# Altium PCB PCB_esp32module_2022-06-23.pcbdoc
Units mm, origin at the board's own origin, x right, y up, seen from the top; angles counter-clockwise.
Board outline 65.1 x 68.98 mm, 2 copper layers (Top Layer, Bottom Layer); 17 components, 31 nets, 101 pads, 69 vias.
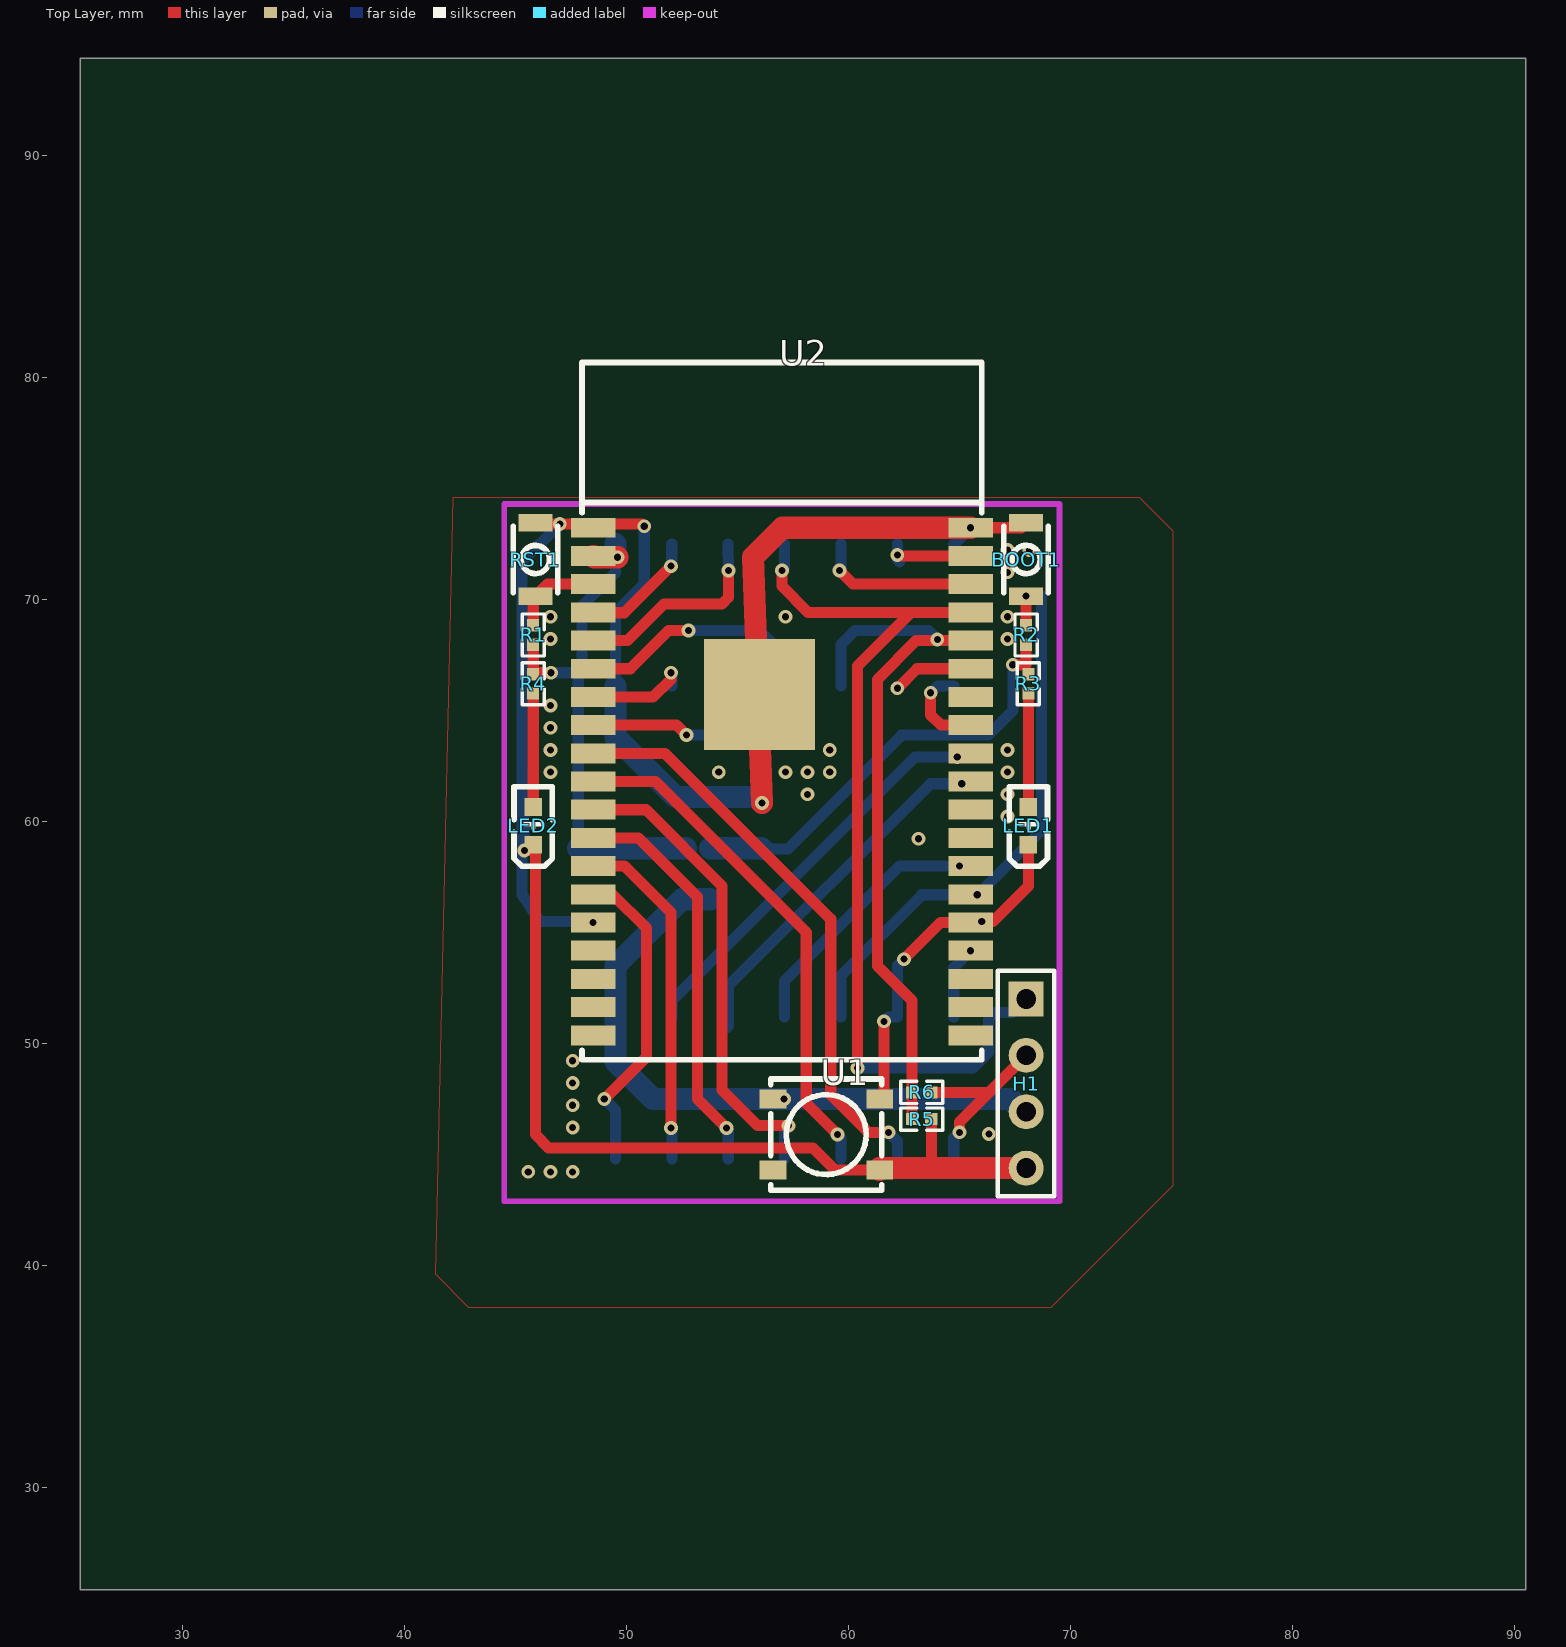
[diagram p0: Top Layer view]
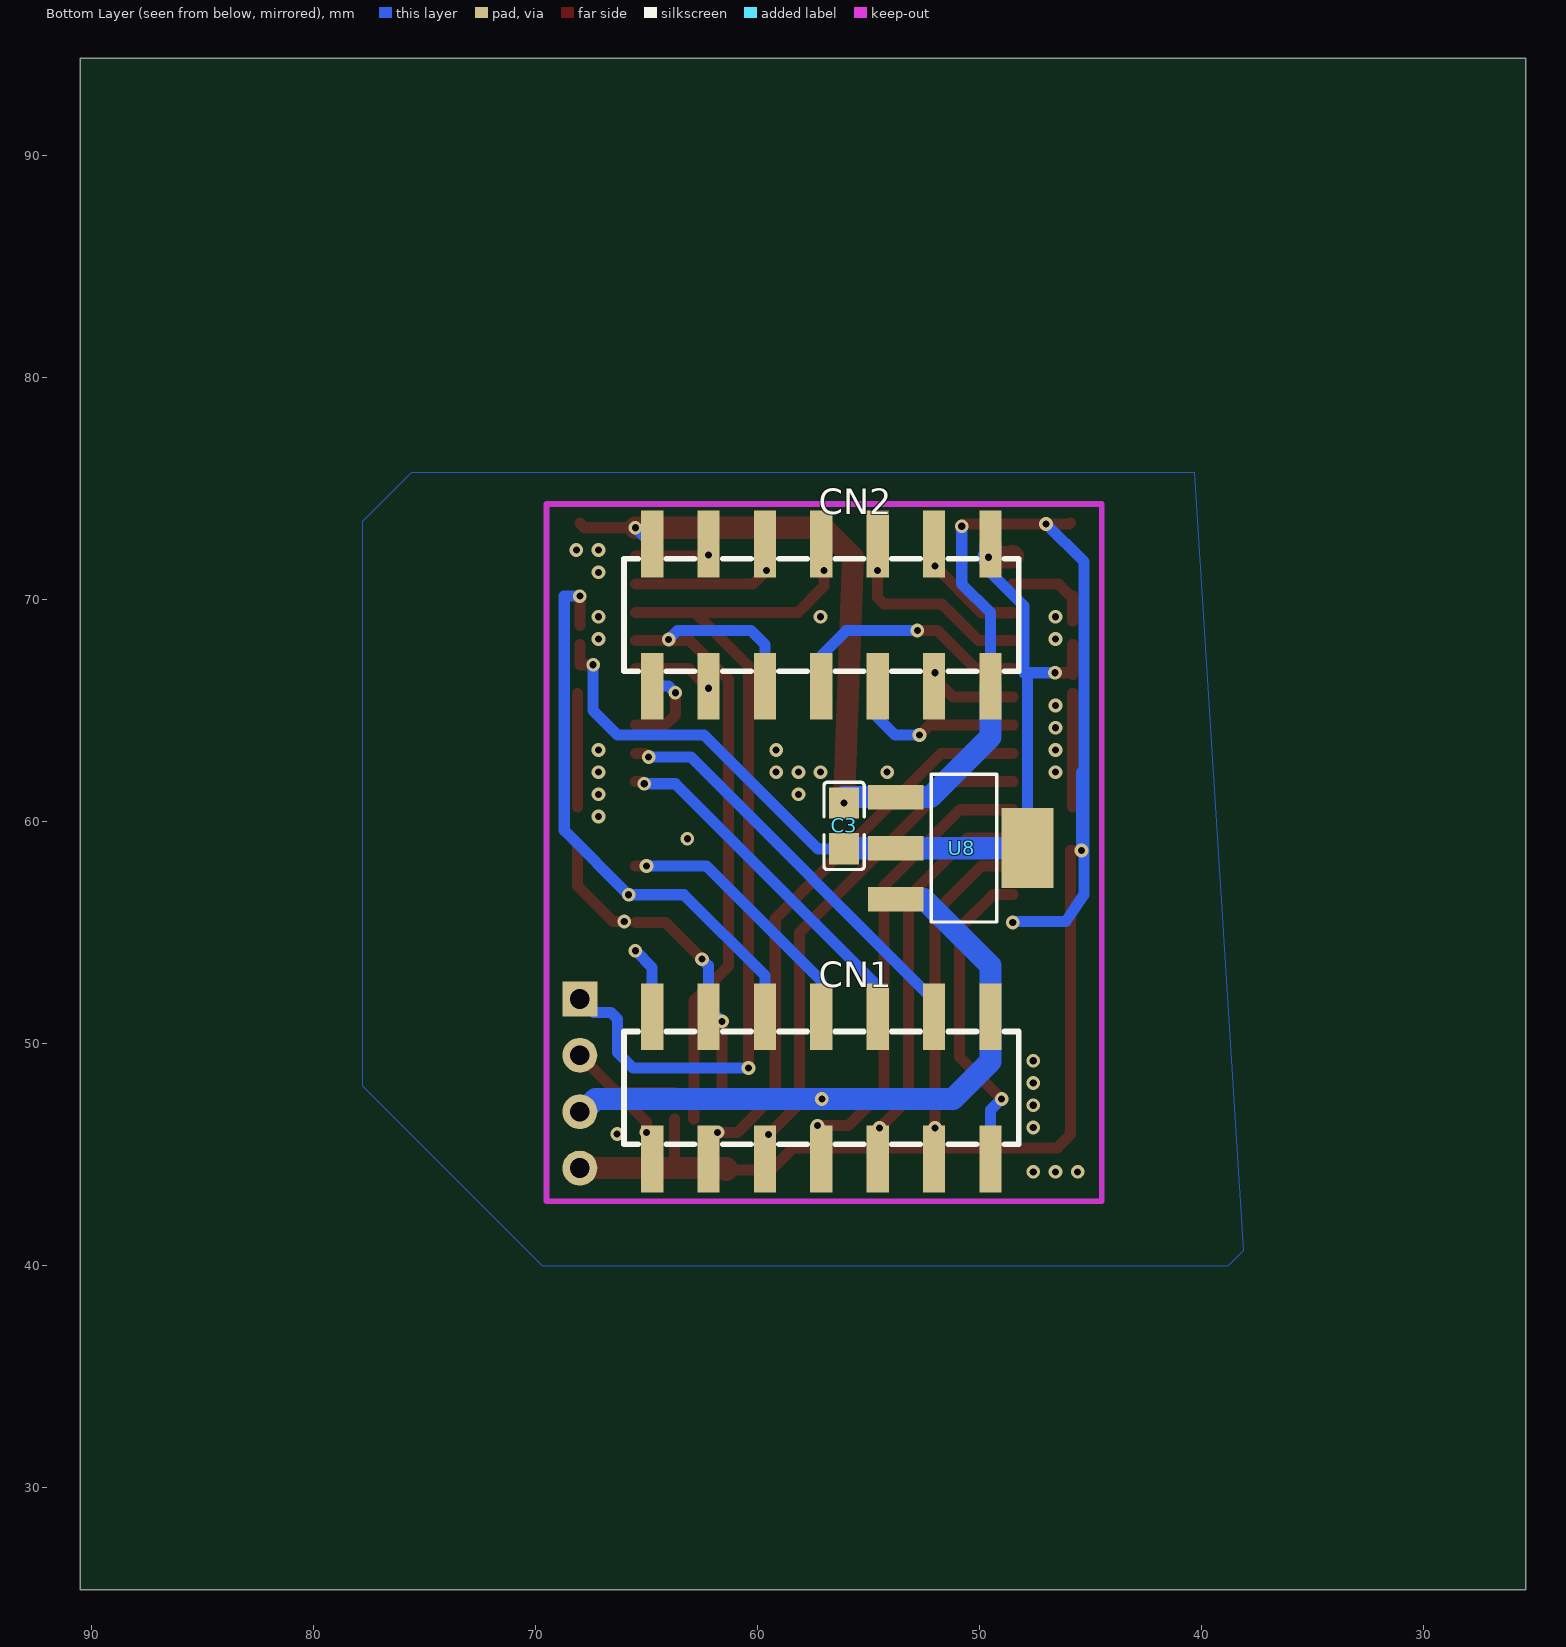
[diagram p1: Bottom Layer view, seen from below]

## Layer stack, top to bottom
Top Layer: signal copper (thickness not stored)
Dielectric: dielectric 0.32, FR-4, Dk 4.8
Bottom Layer: signal copper (thickness not stored)

## Board outline
90.5,25.4 25.4,25.4 25.4,94.375 90.5,94.375

## Components (designator, comment, footprint, x,y, rotation, side; value= is the part's Value field where it differs from the comment)
BOOT1 "K2-1827SQ-C3DW-06" SW-SMD_L3.0-W2.0-LS3.5 68,71.8 r270 top
C3 "10uF" C0805 56.1,59.8 r90 bottom
CN1 "2.54-2*7P针立贴" HDR-SMD_14P-P2.54-V-M-R2-C7-S2.54-LS8.0 57.122,48 r0 bottom
CN2 "2.54-2*7P针立贴" HDR-SMD_14P-P2.54-V-M-R2-C7-S2.54-LS8.0 57.122,69.3 r0 bottom
H1 "HDR-F-2.54_1x4" HDR-F-2.54_1X4 68,48.2 r270 top
LED1 "KT-0603R" LED0603-R-RD 68.1,59.8 r90 top
LED2 "KT-0603R" LED0603-R-RD 45.8,59.8 r90 top
R1 "10kΩ" R0402 45.8,68.4 r270 top
R2 "10kΩ" R0402 68,68.4 r90 top
R3 "10kΩ" R0402 68.1,66.2 r90 top
R4 "10kΩ" R0402 45.8,66.2 r90 top
R5 "10kΩ" R0402 63.3,46.6 r0 top
R6 "10kΩ" R0402 63.3,47.8 r180 top
RST1 "K2-1827SQ-C3DW-06" SW-SMD_L3.0-W2.0-LS3.5 45.9,71.8 r90 top
U1 "5050WS2812B" LED-SMD_5050WS2812B 59,45.9 r0 top
U2 "ESP32-WROVER-IB" WIRELM-SMD_ESP32-WROVER-IB 57,61.8 r0 top
U8 "AZ1117H-3.3TRE1" SOT-223-3_L6.5-W3.4-P2.30-LS7.0-BR 50.8,58.8 r180 bottom

## Footprints (in the part's own frame and the unit in brackets; to place one, negate y for a bottom-side part, rotate by r counter-clockwise, add the part's x,y. Pads: shape width x height; smd on the part's side, far side on the other; paste and mask are expansions set on the pad)
C0805 [mm]
  rect 1.41x1.35 smd: 1(1.03,0) 2(-1.03,0)
  silkscreen extent -1.96,-0.9 1.96,0.9
HDR-F-2.54_1X4 [mil]
  rect 62x62 hole 35: 1(-150,0)
  round 62 hole 35: 2(-50,0) 3(50,0) 4(150,0)
  silkscreen extent -200,-50 200,50
HDR-SMD_14P-P2.54-V-M-R2-C7-S2.54-LS8.0 [mm]
  rect 1x3 smd: 1(7.62,-3.2) 2(7.62,3.2) 3(5.08,-3.2) 4(5.08,3.2) 5(2.54,-3.2) 6(2.54,3.2) 7(0,-3.2) 8(0,3.2) 9(-2.54,-3.2) 10(-2.54,3.2) 11(-5.08,-3.2) 12(-5.08,3.2) 13(-7.62,-3.2) 14(-7.62,3.2)
  silkscreen extent -8.89,-2.54 8.89,2.54
LED0603-R-RD [mm]
  rect 0.8x0.8 smd: 1(0.851,0) 2(-0.851,0)
  silkscreen extent -1.82,-0.86 1.77,0.86
LED-SMD_5050WS2812B [mm]
  rect 1.2x0.85 smd: 1(-2.4,1.6) 2(-2.4,-1.6) 3(2.4,-1.6) 4(2.4,1.6)
  silkscreen extent -2.5,-2.5 2.5,2.5
R0402 [mm]
  rect 0.566x0.54 smd: 1(-0.433,0) 2(0.433,0)
  silkscreen extent -0.94,-0.5 0.94,0.5
SOT-223-3_L6.5-W3.4-P2.30-LS7.0-BR [mm]
  rect 2.5x1.1 smd: 1(-2.97,2.3) 2(-2.97,0) 3(-2.97,-2.3)
  rect 2.34x3.6 smd: 4(2.97,0)
  silkscreen extent -1.37,-3.33 1.57,3.33
SW-SMD_L3.0-W2.0-LS3.5 [mm]
  rect 0.8x1.524 smd: 1(-1.651,0) 2(1.65,0)
  silkscreen extent -1.5,-1 1.5,1
WIRELM-SMD_ESP32-WROVER-IB [mm]
  rect 2x0.9 smd: 1(-8.5,11.43) 2(-8.5,10.16) 3(-8.5,8.89) 4(-8.5,7.62) 5(-8.5,6.35) 6(-8.5,5.08) 7(-8.5,3.81) 8(-8.5,2.54) 9(-8.5,1.27) 10(-8.5,0) 11(-8.5,-1.27) 12(-8.5,-2.54) 13(-8.5,-3.81) 14(-8.5,-5.08) 15(-8.5,-6.35) 16(-8.5,-7.62) 17(-8.5,-8.89) 18(-8.5,-10.16) 19(-8.5,-11.43) 20(8.5,-11.43) 21(8.5,-10.16) 22(8.5,-8.89) 23(8.5,-7.62) 24(8.5,-6.35) 25(8.5,-5.08) 26(8.5,-3.81) 27(8.5,-2.54) 28(8.5,-1.27) 29(8.5,0) 30(8.5,1.27) 31(8.5,2.54) 32(8.5,3.81) 33(8.5,5.08) 34(8.5,6.35) 35(8.5,7.62) 36(8.5,8.89) 37(8.5,10.16) 38(8.5,11.43)
  rect 5x5 smd: 39(-1,3.93)
  silkscreen extent -9,-12.53 9,18.87

## Via types
v1: diameter 0.62, hole 0.32, Top Layer to Bottom Layer, tented both sides, 69 vias

## Nets (pads, with @x,y where several pads share a name; then routed paths per layer and width w, separated by ;. In a path a pad name is that pad's centre, name@x,y a point inside that pad or via, vN(x,y) a via of type N, cw(c..) or ccw(c..) an arc to the next point about the centre after c; other vN are vias at no path point)
3V3: C3.2 CN2.13 R1.2 R2.1 R3.2 R4.2 U2.2 U8.2 U8.4 | length 45.5
  Top Layer w0.5: R1.2@45.8,67.967 45.8,66.633 45.867,66.7 v1(46.6,66.7) ; v1@67.4,67.06 68,67.06 R2.1
  Top Layer w1: U2.2 48.56,71.9 v1(49.6,71.9)
  Bottom Layer w0.5: U8.4 47.83,66.7 46.601,66.7 48,66.7 48,69.7 49.504,71.204 CN2.13@49.504,72.499 ; C3.2 57.271,58.77 62.399,63.901 66.301,63.901 67.401,65.001 v1@67.401,67.061
  Bottom Layer w1: U8.4 U8.2@52.67,58.8 ; CN2.13 49.501,71.999 v1(49.6,71.9) ; U8.2 56.07,58.8 C3.2
  other v1: 67.4,67.06
+5V: CN1.13 H1.3 U1.1 U8.3 | length 29.2
  Bottom Layer w1: U8.3@53.771,56.5 52.501,56.5 49.504,53.503 49.504,51.199 49.504,49.197 51.201,47.5 v1(57.1,47.5) 67.3,47.5 67.871,46.929 H1.3
GND: BOOT1.1 C3.1 CN2.1 CN2.14 H1.4 LED2.2 R5.2 RST1.2 U1.3 U2.1 U2.15 U2.38 U2.39 U8.1 | length 112.5
  Top Layer w0.5: v1(45.4,58.7) 45.9,58.7 45.9,45.9 46.499,45.301 47.901,45.301 ; RST1.2 45.95,73.4 v1(47,73.4) 50.7,73.4 v1(50.8,73.3) ; 47.9,45.3 58.4,45.3 59.4,44.3 U1.3 ; 63.733,44.39 R5.2 ; v1(65.5,73.23) 67.779,73.23 BOOT1.1
  Top Layer w1: v1(56.1,60.83) 55.699,71.9 57.03,73.231 U2.38@65.501,73.231 ; U1.3@61.401,44.3 61.401,44.389 H1.4
  Bottom Layer w0.5: 45.3,61.131 45.3,62.3 45.4,62.2 v1(45.4,58.7) ; v1(47,73.4) 45.3,71.7 45.3,56.7 46.1,55.5 48.45,55.5 v1(48.5,55.45) ; CN2.14 49.503,69.403 50.8,70.7 v1(50.8,73.3) ; CN2.1 64.77,72.5 v1(65.5,73.23)
  Bottom Layer w1: CN2.14@49.504,66.096 49.504,63.802 52.206,61.1 53.771,61.1 56.1,61.1 v1(56.1,60.83)
  other v1: 45.577,44.223 46.577,44.223 47.577,44.223 66.32,45.923 47.577,46.223 47.577,47.223 47.577,48.223 47.577,49.223 63.157,59.223 67.157,60.223 58.157,61.223 67.157,61.223 46.577,62.223 54.157,62.223 57.157,62.223 58.157,62.223 59.157,62.223 67.157,62.223 46.577,63.223 59.157,63.223 67.157,63.223 46.577,64.223 46.577,65.223 46.577,68.223 67.157,68.223 46.577,69.223 57.157,69.223 67.157,69.223 67.157,71.223 67.157,72.223 68.157,72.223
IO-0: BOOT1.2 CN1.5 R2.2 U2.25 | length 26.5
  Top Layer w0.5: U2.25@65.501,56.721 U2.25@65.8,56.7 ; R2.2 v1(68,70.15)
  Bottom Layer w0.5: CN1.5 59.663,53.063 63.3,56.7 v1(65.8,56.7) 68.701,59.601 68.701,70.15 v1(68,70.15)
IO-2: CN1.3 LED1.2 U1.4 U2.24 | length 15.3
  Top Layer w0.5: U1.4 61.6,47.7 v1(61.6,51) ; v1(62.5,53.8) 64.15,55.45 U2.24 ; v1(66,55.5) 66.5,55.5 68.1,57.1 LED1.2
  Bottom Layer w0.5: v1(61.6,51) 61.8,51.199 62.204,51.199 62.204,53.503 v1@62.501,53.8
IO-4: CN1.7 U2.26 | length 12.1
  Top Layer w0.5: v1(65,58) U2.26@65.501,57.991
  Bottom Layer w0.5: CN1.7@57.124,51.199 57.124,52.822 62.3,58.001 v1(65,58)
IO-5: CN1.9 U2.29 | length 16.7
  Top Layer w0.5: v1(65.1,61.7) 65.201,61.801 U2.29@65.501,61.801
  Bottom Layer w0.5: CN1.9@54.5,50.701 54.584,50.782 54.584,51.199 54.584,52.583 63.7,61.699 v1(65.1,61.7)
IO-12: CN1.14 U2.14 | length 14.4
  Top Layer w0.5: U2.14 49.38,56.72 50.9,55.2 50.9,49.4 v1(49,47.5)
  Bottom Layer w0.5: v1(49,47.5) 49.503,46.998 CN1.14
IO-13: U2.16
IO-14: CN1.12 U2.13 | length 15.5
  Top Layer w0.5: U2.13@48.501,57.991 49.91,57.991 52,55.901 v1(52,46.2)
  Bottom Layer w0.5: v1(52,46.2) 52.043,46.158 CN1.12
IO-15: CN1.1 U2.23 | length 3.3
  Bottom Layer w0.5: CN1.1 64.743,53.422 v1(65.5,54.18)
IO-18: CN1.11 U2.30 | length 18.8
  Top Layer w0.5: v1(64.9,62.9) 65.071,63.071 U2.30@65.501,63.071
  Bottom Layer w0.5: CN1.11 52.043,51.943 63,62.9 v1(64.9,62.9)
IO-19: CN2.2 U2.31 | length 4.2
  Top Layer w0.5: v1@63.7,65.8 63.7,64.8 64.16,64.34 U2.31
  Bottom Layer w0.5: v1(63.7,65.8) 64,66.1 CN2.2
IO-21: CN2.4 U2.33 | length 3.8
  Top Layer w0.5: v1(62.2,66) 63.08,66.88 U2.33
  Bottom Layer w0.5: CN2.4@62.201,65.999 CN2.4@62.204,66.101
IO-22: CN2.5 U2.36 | length 7.4
  Top Layer w0.5: v1(59.6,71.3) 60.21,70.69 U2.36
  Bottom Layer w0.5: v1(59.6,71.3) 59.664,71.364 CN2.5@59.664,72.499
IO-23: CN2.3 U2.37 | length 4.2
  Top Layer w0.5: v1(62.2,72) 62.24,71.96 U2.37
  Bottom Layer w0.5: CN2.3@62.204,72.499 62.204,72.004 v1(62.2,72) 62.2,71.799 CN2.3@62.3,71.699
IO-25: CN1.6 U2.10 | length 23.3
  Top Layer w0.5: U2.10@48.501,61.801 51.3,61.801 58.099,55.001 58.099,47.3 v1(59.5,45.9)
  Bottom Layer w0.5: v1(59.5,45.9) 59.663,45.737 CN1.6
IO-26: CN1.8 U2.11 | length 21.7
  Top Layer w0.5: U2.11@48.501,60.531 50.87,60.531 54.3,57.101 54.3,47.9 55.9,46.3 v1(57.3,46.3)
  Bottom Layer w0.5: CN1.8 57.123,46.123 v1(57.3,46.3)
IO-27: CN1.10 U2.12 | length 18.2
  Top Layer w0.5: U2.12@48.501,59.261 50.54,59.261 53.2,56.601 53.2,47.5 v1(54.5,46.2)
  Bottom Layer w0.5: v1(54.5,46.2) 54.583,46.117 CN1.10
IO-32: CN2.10 U2.8 | length 8
  Top Layer w0.5: U2.8@48.501,64.341 50.519,64.341 52.259,64.341 v1(52.7,63.9)
  Bottom Layer w0.5: v1(52.7,63.9) 53.8,63.9 54.582,64.682 CN2.10
IO-33: CN1.4 U2.9 | length 26.4
  Top Layer w0.5: U2.9@48.501,63.071 51.729,63.071 59.199,55.601 59.199,47.701 60.901,45.999 v1(61.8,46)
  Bottom Layer w0.5: v1(61.8,46) 62.203,45.597 CN1.4
IO-34: CN2.8 U2.6 | length 11.2
  Top Layer w0.5: U2.6@48.501,66.881 50.179,66.881 51.899,68.6 v1@52.801,68.6
  Bottom Layer w0.5: v1(52.8,68.6) 55.999,68.6 57.121,67.478 CN2.8
IO-35: CN2.12 U2.7 | length 4.8
  Top Layer w0.5: U2.7 48.51,65.6 51.2,65.6 52,66.4 v1(52,66.7)
  Bottom Layer w0.5: CN2.12@52.001,66.7 52.041,66.657 CN2.12
LED2_1: LED2.1 R4.1 | length 5.1
  Top Layer w0.5: LED2.1@45.8,60.651 R4.1@45.8,65.767
R3_1: LED1.1 R3.1 | length 5.1
  Top Layer w0.5: LED1.1 R3.1
RX: CN2.6 R5.1 R6.2 U2.34 | length 32.1
  Top Layer w0.5: R6.2 62.867,51.933 61.3,53.5 61.3,66.401 63.05,68.151 U2.34@65.501,68.151 ; R5.1 R6.2 ; v1(64,68.2) v1@64.132,68.199
  Bottom Layer w0.5: CN2.6@59.664,66.101 59.664,67.963 60.299,68.6 63.601,68.6 v1(64,68.2)
RX5: CN1.2 H1.2 R6.1 | length 9.7
  Top Layer w0.5: R6.1 66.33,47.8 H1.2 ; v1(65,46) 65,46.469 67.116,48.585
  Bottom Layer w0.5: CN1.2 64.742,45.743 v1(65,46)
SEN_VN: CN2.9 U2.5 | length 9.3
  Top Layer w0.5: U2.5 50.05,68.15 51.4,69.5 51.7,69.8 54.3,69.8 54.6,70.1 v1(54.6,71.3)
  Bottom Layer w0.5: CN2.9 v1(54.6,71.3)
SEN_VP: CN2.11 U2.4 | length 5.4
  Top Layer w0.5: U2.4 48.52,69.4 49.9,69.4 v1(52,71.5)
  Bottom Layer w0.5: CN2.11@52.001,71.501 52.041,71.542 CN2.11
TX: CN2.7 H1.1 U2.35 | length 42.9
  Top Layer w0.5: v1(57,71.3) 57,70.6 58.179,69.421 63.52,69.421 ; v1(60.4,48.9) 60.4,67 62.821,69.421 U2.35@65.501,69.421
  Bottom Layer w0.5: v1(57,71.3) 57.124,71.424 CN2.7@57.124,72.499 ; v1(60.4,48.9) 65.6,48.9 66.3,49.6 66.3,51.1 66.6,51.4 67.39,51.4 H1.1
U2_3: R1.1 RST1.1 U2.3 | length 4
  Top Layer w0.5: R1.1@45.8,69.032 45.8,70.15 RST1.1 ; RST1.1 46.44,70.69 U2.3
pads on no net: U1.2 U2.17 U2.18 U2.19 U2.20 U2.21 U2.22 U2.27 U2.28 U2.32

## Polygon pours and split planes (outlines as drawn)
GND on Top Layer (solid): 42.2,74.6 73.1,74.6 74.6,73.1 74.6,43.6 69.1,38.1 42.9,38.1 41.4,39.6
GND on Bottom Layer (solid): 40.3,75.7 75.6,75.7 77.8,73.5 77.8,48.1 69.7,40 38.8,40 38.1,40.7